# Altium PCB carrier board Ultrafiltrasi.PcbDoc (part 4 of 4)
Units mm, origin at the board's own origin, x right, y up, seen from the top; angles counter-clockwise.
Board outline 196.34 x 220.85 mm, 2 copper layers (Top Layer, Bottom Layer); 114 components, 209 nets, 667 pads, 70 vias.
Unrouted connection lines stored in the file: 5.
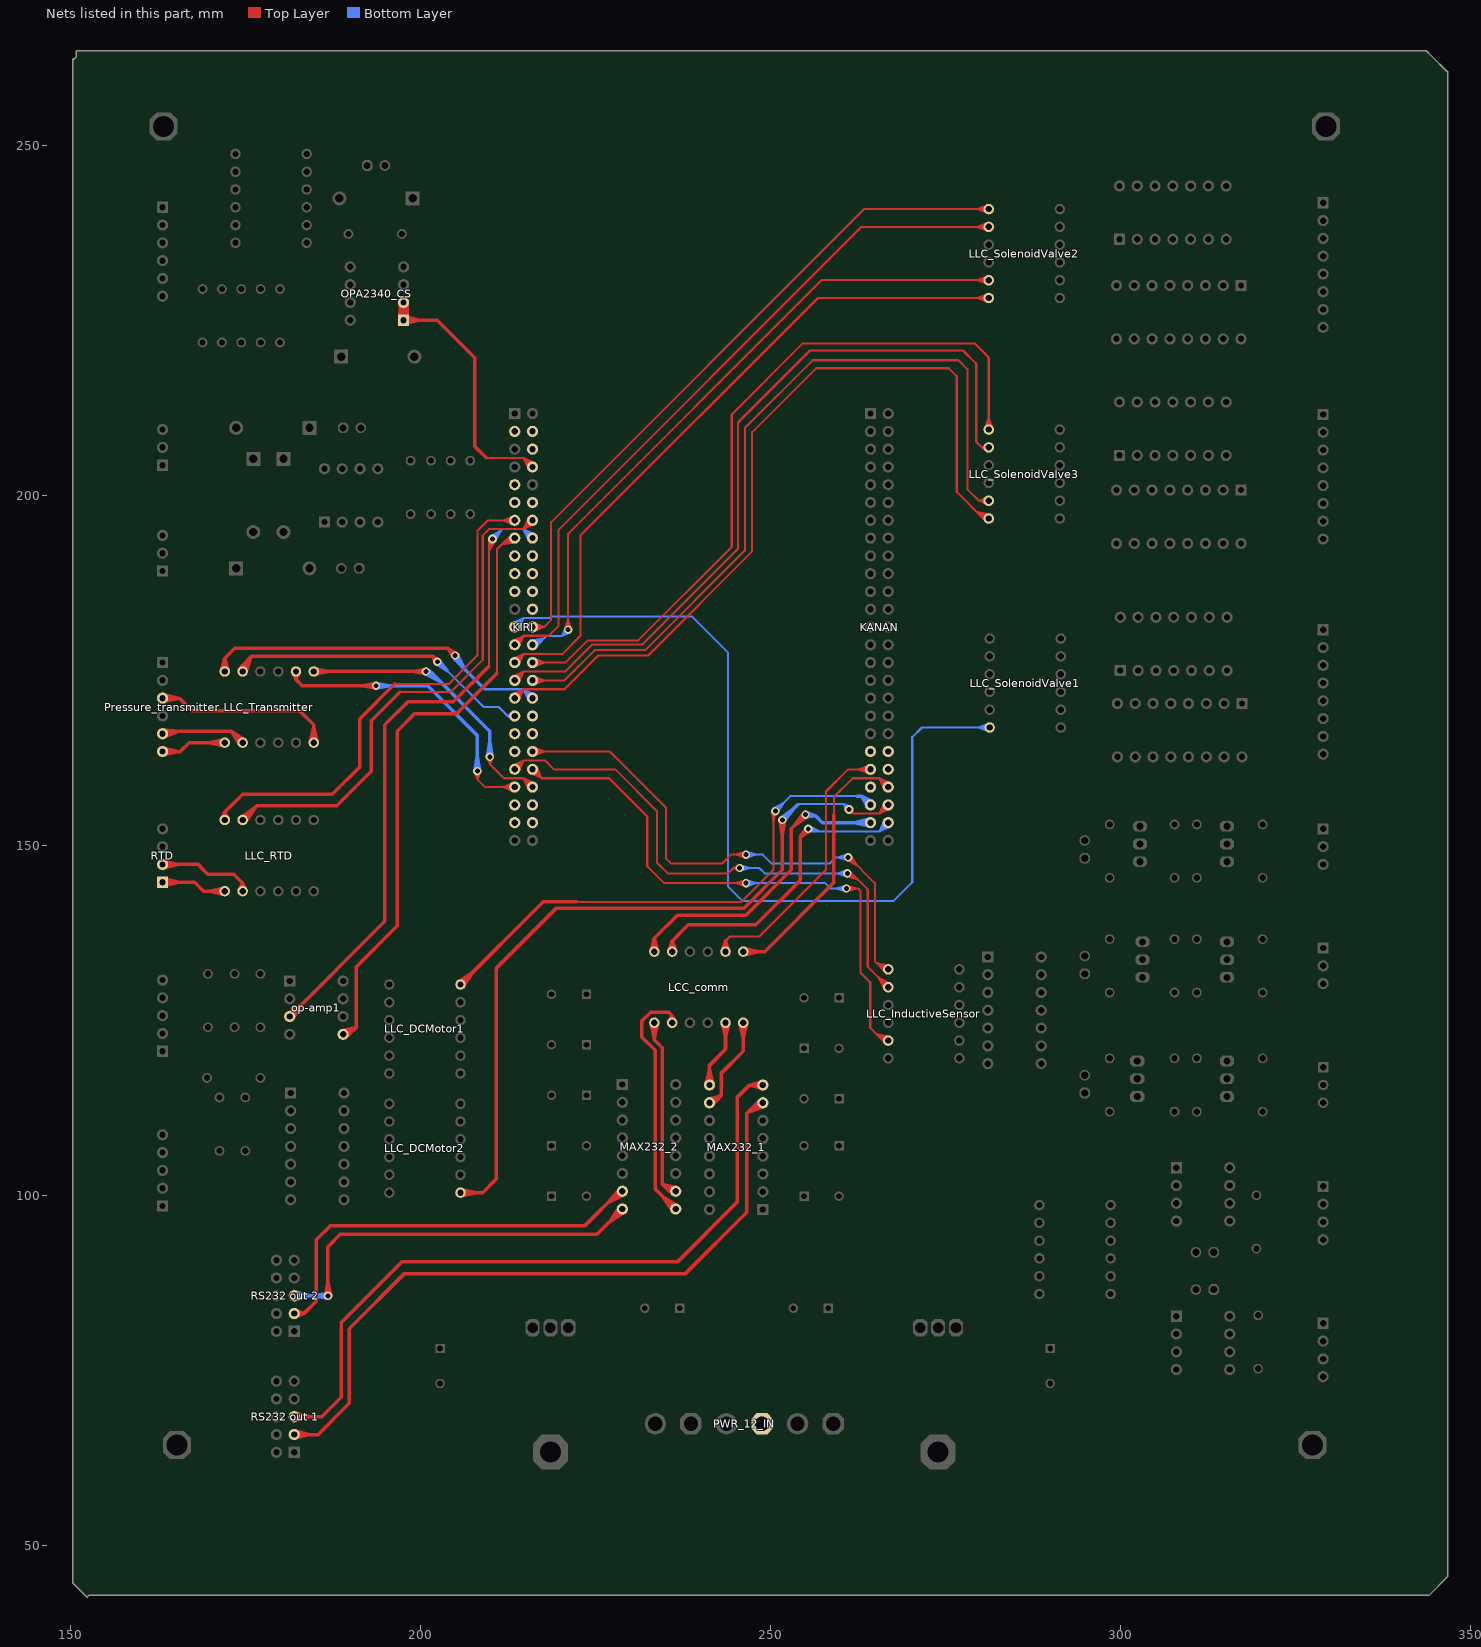
[diagram p4: the nets of this part, all layers, seen from the top]

## Via types
v1: diameter 1.2, hole 0.711, Top Layer to Bottom Layer, 26 vias
v2: diameter 1.27, hole 0.711, Top Layer to Bottom Layer, 24 vias
v3: diameter 1.2, hole 0.7, Top Layer to Bottom Layer, 19 vias
v4: diameter 1.5, hole 0.8, Top Layer to Bottom Layer, 1 vias

## Nets (pads, with @x,y where several pads share a name; then routed paths per layer and width w, separated by ;. In a path a pad name is that pad's centre, name@x,y a point inside that pad or via, vN(x,y) a via of type N, cw(c..) or ccw(c..) an arc to the next point about the centre after c; other vN are vias at no path point) (continued)
NetKANAN_39: KANAN.39
NetKANAN_40: KANAN.40
NetKANAN_41: KANAN.41 LCC_comm.P$2 | length 48.8
  Top Layer w0.3: 243.586,136.398 244.221,137.033 248.412,137.033 257.937,146.558 257.937,157.734 261.112,160.909 KANAN.41@264.287,160.909 ; KANAN.41@264.163,160.271 262.587,160.909 ; KANAN.41@264.163,161.547 262.587,160.909 ; KANAN.41@264.251,160.561 262.587,160.909 ; KANAN.41@264.251,161.257 262.587,160.909
  Top Layer w0.5: LCC_comm.P$2@243.093,134.956 243.586,136.398 ; LCC_comm.P$2@243.586,134.874 243.586,136.398 ; LCC_comm.P$2@244.079,134.956 243.586,136.398
NetKANAN_42: KANAN.42
NetKANAN_43: KANAN.43
NetKANAN_44: KANAN.44 LCC_comm.P$1 | length 52.1
  Top Layer w0.3: 259.08,154.432 259.08,156.972 261.747,159.639 265.557,159.639 ; KANAN.44@266.292,158 265.557,159.639 ; KANAN.44@266.557,158.147 265.557,159.639 ; KANAN.44@267.049,158.639 265.557,159.639 ; KANAN.44@267.196,158.904 265.557,159.639 ; 265.557,159.639 KANAN.44@266.827,158.369 265.557,159.639
  Top Layer w0.5: LCC_comm.P$1@246.126,134.874 249.174,134.874 259.08,144.78 259.08,154.432 ; LCC_comm.P$1@246.182,134.377 248.376,134.874 LCC_comm.P$1@246.182,135.371
NetKANAN_45: KANAN.45 LLC_DCMotor1.P$6 | length 92.1
  Top Layer w0.3: 222.25,141.986 245.872,141.986 250.444,146.558 250.444,154.686 v1(250.698,154.94) 250.444,153.367 v1@250.248,154.948
  Top Layer w0.5: LLC_DCMotor1.P$6@205.423,130.561 207.551,131.986 LLC_DCMotor1.P$6@206.126,129.858 ; LLC_DCMotor1.P$6@205.74,130.175 217.551,141.986 222.25,141.986
  Bottom Layer w0.3: v1@250.423,155.296 251.934,156.176 v1@251.054,154.665 ; v1(250.698,154.94) 252.837,157.079 262.382,157.079
  Bottom Layer w0.5: 262.382,157.079 263.037,157.079 ; KANAN.45@263.842,155.505 263.037,157.079 ; KANAN.45@264.611,156.274 263.037,157.079 ; 263.037,157.079 KANAN.45@264.287,155.829 263.037,157.079
NetKANAN_46: KANAN.46 LLC_DCMotor2.P$1 | length 135.6
  Top Layer w0.3: v2(261.239,155.194) 261.854,154.579 265.577,154.579 ; KANAN.46@266.291,156.196 265.577,154.579 ; KANAN.46@266.556,156.051 265.577,154.579 ; KANAN.46@267.049,155.558 265.577,154.579 ; KANAN.46@267.194,155.293 265.577,154.579 ; 265.577,154.579 KANAN.46@266.827,155.829 265.577,154.579
  Top Layer w0.5: LLC_DCMotor2.P$1@205.74,100.457 208.915,100.457 210.82,102.362 210.82,132.461 219.456,141.097 246.253,141.097 251.714,146.558 v3(251.714,153.67) 251.714,151.57 ; LLC_DCMotor2.P$1@205.796,99.96 207.99,100.457 LLC_DCMotor2.P$1@205.796,100.954 ; v3@251.365,153.641 251.714,151.57 ; v3@252.063,153.641 251.714,151.57
  Bottom Layer w0.3: 253.873,155.829 254,155.956 260.477,155.956 ; v2@260.828,154.937 260.477,155.956 ; v2@261.097,155.075 260.477,155.956 ; v2(261.239,155.194) 260.477,155.956 ; v2@261.358,155.336 260.477,155.956 ; v2@261.496,155.605 260.477,155.956
  Bottom Layer w0.5: v3@251.486,153.935 253.375,155.331 v3@251.979,153.442 ; v3(251.714,153.67) 253.873,155.829
NetKANAN_47: KANAN.47 LCC_comm.P$6 | length 63.9
  Top Layer w0.5: LCC_comm.P$6@232.93,134.94 233.426,136.779 ; LCC_comm.P$6@233.426,134.874 233.426,136.779 ; LCC_comm.P$6@233.922,134.94 233.426,136.779 ; v3@254.751,154.66 253.355,152.771 ; v3(255.016,154.432) 253.355,152.771 ; v3@255.244,154.167 253.355,152.771 ; v3@255.397,154.305 254.889,154.305 252.984,152.4 252.984,146.558 246.507,140.081 236.728,140.081 233.426,136.779
  Bottom Layer w0.5: v3@255.016,154.305 256.413,154.305 ; v3(255.016,154.432) 256.413,154.305 ; v3@255.028,154.082 256.413,154.305 ; v3@255.091,154.774 256.413,154.305 ; KANAN.47@264.221,152.743 261.987,153.289 KANAN.47@264.221,153.835 ; KANAN.47@264.287,153.289 257.429,153.289 256.413,154.305
NetKANAN_48: KANAN.48 LCC_comm.P$5 | length 65.5
  Top Layer w0.5: LCC_comm.P$5@235.473,134.956 235.966,136.398 ; LCC_comm.P$5@235.966,134.874 235.966,136.398 ; LCC_comm.P$5@236.459,134.956 235.966,136.398 ; v3@255.124,152.619 254.254,151.257 ; v3@255.27,152.273 254.254,151.257 ; v3@255.397,152.146 v3(255.397,152.4) 254.254,151.257 ; v3@255.616,152.127 254.254,151.257 ; 235.966,136.398 238.252,138.684 247.904,138.684 254.254,145.034 254.254,151.257
  Bottom Layer w0.3: v3@255.356,151.952 257.098,152.019 ; v3@255.551,152.823 257.098,152.019 ; KANAN.48@266.292,153.658 265.557,152.019 ; KANAN.48@266.557,153.511 265.557,152.019 ; KANAN.48@267.049,153.019 265.557,152.019 ; KANAN.48@267.196,152.754 265.557,152.019 ; 257.098,152.019 v3(255.397,152.4) 255.778,152.019 265.557,152.019 ; 265.557,152.019 KANAN.48@266.827,153.289 265.557,152.019
NetKIRI_3: KIRI.3 KIRI.4
NetKIRI_6: KIRI.6
NetKIRI_8: KIRI.8 OPA2340_CS.1 OPA2340_CS.2 | length 73.9
  Top Layer w0.3: 209.403,205.379 214.737,205.379 ; KIRI.8@215.493,203.719 214.737,205.379 ; KIRI.8@215.757,203.866 214.737,205.379 ; KIRI.8@216.25,204.359 214.737,205.379 ; KIRI.8@216.397,204.623 214.737,205.379 ; 214.737,205.379 KIRI.8@216.027,204.089 214.737,205.379
  Top Layer w0.5: OPA2340_CS.1@197.065,224.991 OPA2340_CS.2@197.116,227.311 ; OPA2340_CS.1@197.066,225.11 197.612,227.344 OPA2340_CS.1@198.158,225.11 ; OPA2340_CS.2@197.066,227.518 197.612,225.284 OPA2340_CS.2@198.158,227.518 ; OPA2340_CS.1@197.092,225.224 OPA2340_CS.2@198.108,227.311 ; OPA2340_CS.2@197.612,227.584 OPA2340_CS.1@197.612,225.044 ; OPA2340_CS.1@197.678,224.498 199.912,225.044 OPA2340_CS.1@197.678,225.59 ; OPA2340_CS.1@198.132,225.224 OPA2340_CS.2@197.116,227.311 ; OPA2340_CS.1@198.159,224.991 OPA2340_CS.2@198.108,227.311 ; 209.403,205.379 207.772,207.01 207.772,219.71 202.438,225.044 OPA2340_CS.1@197.612,225.044 ; OPA2340_CS.2@197.116,227.311 OPA2340_CS.1@197.612,225.044 ; OPA2340_CS.1@197.612,225.044 OPA2340_CS.2@198.108,227.311
NetKIRI_9: KIRI.9
NetKIRI_11: KIRI.11
NetKIRI_12: KIRI.12
NetKIRI_13: KIRI.13 LLC_RTD.P$6 | length 83.3
  Top Layer w0.3: 196.342,173.101 204.089,173.101 208.153,177.165 208.153,194.945 209.677,196.469 KIRI.13@213.487,196.469 ; KIRI.13@213.363,195.831 211.787,196.469 ; KIRI.13@213.363,197.107 211.787,196.469 ; KIRI.13@213.451,196.121 211.787,196.469 ; KIRI.13@213.451,196.817 211.787,196.469
  Top Layer w0.5: LLC_RTD.P$6@171.597,153.779 172.085,154.813 ; LLC_RTD.P$6@172.085,153.67 172.085,154.813 ; LLC_RTD.P$6@172.573,153.779 172.085,154.813 ; 196.342,173.101 191.389,168.148 191.389,161.29 187.452,157.353 174.625,157.353 172.085,154.813
NetKIRI_14: KIRI.14 LLC_RTD.P$5 | length 87.9
  Top Layer w0.3: 197.04,171.958 204.343,171.958 208.915,176.53 208.915,194.31 209.804,195.199 214.757,195.199 ; KIRI.14@215.492,196.838 214.757,195.199 ; KIRI.14@215.757,196.691 214.757,195.199 ; KIRI.14@216.249,196.199 214.757,195.199 ; KIRI.14@216.396,195.934 214.757,195.199 ; 214.757,195.199 KIRI.14@216.027,196.469 214.757,195.199
  Top Layer w0.5: LLC_RTD.P$5@174.308,154.056 176.436,155.481 LLC_RTD.P$5@175.011,153.353 ; LLC_RTD.P$5@174.625,153.67 176.657,155.702 188.087,155.702 192.992,160.607 192.992,167.846 197.04,171.894
NetKIRI_15: KIRI.15 op-amp1.5 | length 115.1
  Top Layer w0.3: 210.947,174.625 210.947,192.318 212.558,193.929 ; KIRI.15@213.111,194.459 211.659,193.03 ; KIRI.15@213.306,194.229 211.659,193.03 ; KIRI.15@213.614,193.603 211.659,193.03 ; KIRI.15@213.677,193.307 211.659,193.03 ; 211.659,193.03 KIRI.15@213.487,193.929 ; 212.558,193.929 KIRI.15@213.487,193.929 ; 212.558,193.929 213.421,194.273 212.558,193.929 ; 212.558,193.929 213.421,193.585 212.558,193.929 ; 212.558,193.929 213.26,194.538 212.558,193.929 ; 212.558,193.929 213.26,193.32 212.558,193.929 ; 212.558,193.929 KIRI.15@213.487,193.929
  Top Layer w0.5: op-amp1.5@188.781,123.577 190.881,124.079 ; op-amp1.5@189.295,122.615 190.881,124.079 ; 210.947,174.625 205.2,168.878 199.231,168.878 196.723,166.37 196.723,138.557 190.881,132.715 190.881,124.079 ; op-amp1.5@188.976,123.063 189.865,123.063 ; op-amp1.5@188.976,123.063 190.881,124.079 ; op-amp1.5@188.976,123.063 189.865,123.063 ; 189.865,123.063 189.146,122.54 189.865,123.063 ; 189.865,123.063 189.146,123.586 189.865,123.063 ; 189.865,123.063 190.881,124.079
NetKIRI_16: KIRI.16 op-amp1.3 | length 121.2
  Top Layer w0.3: 209.804,175.641 209.804,193.294 v2(210.312,193.802) 209.804,192.1 ; v2@209.833,193.876 209.804,192.1 ; v2@210.132,193.846 209.804,192.1 ; v2@210.486,193.74 209.804,192.1 ; v2@210.753,193.601 209.804,192.1 ; KIRI.16@215.987,193.929 KIRI.16@216.027,193.929
  Top Layer w0.5: op-amp1.3@181.01,126.03 183.217,127.464 op-amp1.3@181.783,125.257 ; op-amp1.3@181.356,125.603 194.945,139.192 194.945,167.259 198.247,170.561 204.724,170.561 209.804,175.641
  Bottom Layer w0.3: v2@210.018,194.188 211.583,195.073 ; v2@210.188,193.939 211.583,195.073 ; v2(210.312,193.802) 211.709,195.199 214.757,195.199 ; v2@210.449,193.678 211.583,195.073 ; v2@210.698,193.508 211.583,195.073 ; KIRI.16@215.492,193.56 214.757,195.199 ; KIRI.16@215.757,193.707 214.757,195.199 ; KIRI.16@216.249,194.199 214.757,195.199 ; KIRI.16@216.396,194.464 214.757,195.199 ; 214.757,195.199 KIRI.16@216.027,193.929 214.757,195.199
NetKIRI_17: KIRI.17
NetKIRI_18: KIRI.18
NetKIRI_19: KIRI.19
NetKIRI_20: KIRI.20
NetKIRI_21: KIRI.21
NetKIRI_22: KIRI.22
NetKIRI_24: KIRI.24
NetKIRI_25: KIRI.25 LLC_SolenoidValve1.P$6 | length 141.1
  Bottom Layer w0.3: KIRI.25@213.117,181.763 214.777,182.519 ; KIRI.25@213.264,181.499 214.777,182.519 ; KIRI.25@213.487,181.229 214.777,182.519 ; KIRI.25@213.757,181.006 214.777,182.519 ; KIRI.25@214.021,180.859 214.777,182.519 ; LLC_SolenoidValve1.P$6@281.196,166.288 279.655,166.878 ; LLC_SolenoidValve1.P$6@281.196,167.468 279.655,166.878 ; LLC_SolenoidValve1.P$6@281.278,166.579 279.655,166.878 ; LLC_SolenoidValve1.P$6@281.278,167.177 279.655,166.878 ; LLC_SolenoidValve1.P$6@281.305,166.878 271.653,166.878 270.256,165.481 270.256,144.78 267.589,142.113 245.999,142.113 243.967,144.145 243.967,177.546 238.76,182.753 218.694,182.753 218.46,182.519 214.777,182.519
NetKIRI_26: KIRI.26 LLC_SolenoidValve2.P$1 | length 111.3
  Top Layer w0.3: KIRI.26@216.027,181.229 217.678,181.229 ; KIRI.26@216.064,180.881 217.678,181.229 ; KIRI.26@216.064,181.577 217.678,181.229 ; KIRI.26@216.155,180.592 217.678,181.229 ; KIRI.26@216.155,181.866 217.678,181.229 ; LLC_SolenoidValve2.P$1@281.069,240.329 279.528,240.919 ; LLC_SolenoidValve2.P$1@281.069,241.509 279.528,240.919 ; LLC_SolenoidValve2.P$1@281.151,240.62 279.528,240.919 ; LLC_SolenoidValve2.P$1@281.151,241.218 279.528,240.919 ; LLC_SolenoidValve2.P$1@281.178,240.919 263.398,240.919 218.694,196.215 218.694,182.245 217.678,181.229
NetKIRI_27: KIRI.27 LLC_SolenoidValve2.P$2 | length 114.3
  Top Layer w0.3: KIRI.27@213.117,179.223 214.777,179.979 ; KIRI.27@213.264,178.959 214.777,179.979 ; KIRI.27@213.487,178.689 214.777,179.979 ; KIRI.27@213.757,178.466 214.777,179.979 ; KIRI.27@214.021,178.319 214.777,179.979 ; LLC_SolenoidValve2.P$2@281.069,237.789 279.528,238.379 ; LLC_SolenoidValve2.P$2@281.069,238.969 279.528,238.379 ; LLC_SolenoidValve2.P$2@281.151,238.08 279.528,238.379 ; LLC_SolenoidValve2.P$2@281.151,238.678 279.528,238.379 ; LLC_SolenoidValve2.P$2@281.178,238.379 263.017,238.379 219.71,195.072 219.71,181.356 218.333,179.979 214.777,179.979
NetKIRI_28: KIRI.28 LLC_SolenoidValve2.P$5 | length 116.9
  Top Layer w0.3: v1@220.662,180.916 221.107,182.348 v1@221.552,180.916 ; v1(221.107,180.848) 221.107,194.564 257.302,230.759 LLC_SolenoidValve2.P$5@281.178,230.759 ; LLC_SolenoidValve2.P$5@281.069,230.169 279.528,230.759 ; LLC_SolenoidValve2.P$5@281.069,231.349 279.528,230.759 ; LLC_SolenoidValve2.P$5@281.151,230.46 279.528,230.759 ; LLC_SolenoidValve2.P$5@281.151,231.058 279.528,230.759
  Bottom Layer w0.3: KIRI.28@215.803,179.299 217.78,179.68 ; KIRI.28@215.882,179.008 217.78,179.68 ; KIRI.28@216.225,178.4 217.78,179.68 ; KIRI.28@216.434,178.182 217.78,179.68 ; v1@220.737,181.104 220.218,179.959 ; v1(221.107,180.848) 220.218,179.959 ; v1@221.363,180.478 220.218,179.959 ; 217.78,179.68 KIRI.28@216.027,178.689 216.789,178.689 218.059,179.959 220.218,179.959
NetKIRI_29: KIRI.29 LLC_SolenoidValve2.P$6 | length 111.3
  Top Layer w0.3: KIRI.29@213.12,176.685 214.737,177.399 ; KIRI.29@213.265,176.42 214.737,177.399 ; KIRI.29@213.487,176.149 214.737,177.399 ; KIRI.29@213.758,175.927 214.737,177.399 ; KIRI.29@214.023,175.782 214.737,177.399 ; LLC_SolenoidValve2.P$6@281.069,227.629 279.528,228.219 ; LLC_SolenoidValve2.P$6@281.069,228.809 279.528,228.219 ; LLC_SolenoidValve2.P$6@281.151,227.92 279.528,228.219 ; LLC_SolenoidValve2.P$6@281.151,228.518 279.528,228.219 ; LLC_SolenoidValve2.P$6@281.178,228.219 256.794,228.219 222.885,194.31 222.885,179.959 220.325,177.399 214.737,177.399
NetKIRI_30: KIRI.30 LLC_SolenoidValve3.P$1 | length 119.6
  Top Layer w0.3: KIRI.30@216.027,176.149 220.726,176.149 223.901,179.324 231.14,179.324 244.475,192.659 244.475,211.582 254.635,221.742 279.146,221.742 281.178,219.71 LLC_SolenoidValve3.P$1@281.178,209.423 ; KIRI.30@216.063,175.801 217.727,176.149 ; KIRI.30@216.063,176.497 217.727,176.149 ; KIRI.30@216.151,175.511 217.727,176.149 ; KIRI.30@216.151,176.787 217.727,176.149 ; LLC_SolenoidValve3.P$1@280.588,209.532 281.178,211.073 ; LLC_SolenoidValve3.P$1@280.879,209.45 281.178,211.073 ; LLC_SolenoidValve3.P$1@281.477,209.45 281.178,211.073 ; LLC_SolenoidValve3.P$1@281.768,209.532 281.178,211.073
NetKIRI_31: KIRI.31 LLC_SolenoidValve3.P$2 | length 121.3
  Top Layer w0.3: KIRI.31@213.118,174.144 214.757,174.879 ; KIRI.31@213.265,173.879 214.757,174.879 ; KIRI.31@213.487,173.609 214.757,174.879 ; KIRI.31@213.757,173.387 214.757,174.879 ; KIRI.31@214.022,173.24 214.757,174.879 ; LLC_SolenoidValve3.P$2@281.001,206.31 280.162,206.883 ; LLC_SolenoidValve3.P$2@281.001,207.456 280.162,206.883 ; LLC_SolenoidValve3.P$2@281.134,206.586 280.162,206.883 ; LLC_SolenoidValve3.P$2@281.134,207.18 280.162,206.883 ; LLC_SolenoidValve3.P$2@281.178,206.883 280.162,206.883 ; 214.757,174.879 220.686,174.879 224.531,178.724 231.683,178.724 245.364,192.405 245.364,210.439 255.651,220.726 277.495,220.726 279.4,218.821 279.4,207.645 280.162,206.883
NetKIRI_32: KIRI.32 LLC_SolenoidValve3.P$5 | length 126.5
  Top Layer w0.3: KIRI.32@216.027,173.609 220.599,173.609 224.917,177.927 232.116,177.927 246.38,192.191 246.38,209.677 256.032,219.329 276.86,219.329 278.13,218.059 278.13,200.914 279.781,199.263 ; KIRI.32@216.063,173.261 217.727,173.609 ; KIRI.32@216.063,173.957 217.727,173.609 ; KIRI.32@216.151,172.971 217.727,173.609 ; KIRI.32@216.151,174.247 217.727,173.609 ; LLC_SolenoidValve3.P$5@281.049,198.677 279.781,199.263 ; LLC_SolenoidValve3.P$5@281.049,199.849 279.781,199.263 ; LLC_SolenoidValve3.P$5@281.146,198.965 279.781,199.263 ; LLC_SolenoidValve3.P$5@281.146,199.561 279.781,199.263 ; 279.781,199.263 LLC_SolenoidValve3.P$5@281.178,199.263 279.781,199.263
NetKIRI_33: KIRI.33 LLC_SolenoidValve3.P$6 | length 140
  Top Layer w0.3: KIRI.33@213.118,171.604 214.757,172.339 ; KIRI.33@213.265,171.339 214.757,172.339 ; KIRI.33@213.487,171.069 214.757,172.339 ; KIRI.33@213.757,170.847 214.757,172.339 ; KIRI.33@214.022,170.7 214.757,172.339 ; LLC_SolenoidValve3.P$6@280.807,196.251 279.403,197.736 ; LLC_SolenoidValve3.P$6@281.011,196.474 279.403,197.736 ; LLC_SolenoidValve3.P$6@281.307,196.994 279.403,197.736 ; LLC_SolenoidValve3.P$6@281.396,197.282 279.403,197.736 ; 214.757,172.339 220.599,172.339 225.425,177.165 232.537,177.165 247.396,192.024 247.396,209.042 256.54,218.186 275.463,218.186 276.606,217.043 276.606,200.533 280.416,196.723 ; 279.403,197.736 LLC_SolenoidValve3.P$6@281.178,196.723 ; 280.416,196.723 LLC_SolenoidValve3.P$6@281.178,196.723 ; 280.416,196.723 281.119,197.017 280.416,196.723 ; 280.416,196.723 281.119,196.429 280.416,196.723 ; 280.416,196.723 280.942,197.275 280.416,196.723 ; 280.416,196.723 280.942,196.171 280.416,196.723 ; 280.416,196.723 LLC_SolenoidValve3.P$6@281.178,196.723
NetKIRI_34: KIRI.34 LLC_Transmitter.P$6 | length 77.3
  Top Layer w0.5: LLC_Transmitter.P$6@171.589,174.945 172.085,176.784 ; LLC_Transmitter.P$6@172.085,174.879 172.085,176.784 ; LLC_Transmitter.P$6@172.581,174.945 172.085,176.784 ; v3@204.702,176.949 203.962,178.181 ; v3@205.194,177.441 203.962,178.181 ; 172.085,176.784 173.482,178.181 203.962,178.181 ; 203.962,178.181 v3(204.978,177.165) 203.962,178.181
  Bottom Layer w0.3: 209.042,172.466 209.169,172.339 214.757,172.339 ; KIRI.34@215.492,170.7 214.757,172.339 ; KIRI.34@215.757,170.847 214.757,172.339 ; KIRI.34@216.249,171.339 214.757,172.339 ; KIRI.34@216.396,171.604 214.757,172.339 ; 214.757,172.339 KIRI.34@216.027,171.069 214.757,172.339
  Bottom Layer w0.5: v3@204.704,176.947 206.345,175.163 ; v3@205.281,177.341 206.345,175.163 ; 209.042,172.466 204.978,176.53 ; 204.978,176.53 v3(204.978,177.165) ; 204.978,176.53 204.642,177.069 204.978,176.53 ; 204.978,176.53 205.314,177.069 204.978,176.53 ; 204.978,176.53 v3(204.978,177.165) ; v3(204.978,177.165) 206.345,175.163
NetKIRI_35: KIRI.35 LLC_Transmitter.P$5 | length 68.5
  Top Layer w0.5: LLC_Transmitter.P$5@174.221,175.174 175.895,177.038 ; LLC_Transmitter.P$5@175.079,174.67 175.895,177.038 ; v3@202.134,176.103 201.803,177.038 ; v3(202.438,176.276) 201.803,177.038 ; v3@202.438,176.403 201.803,177.038 ; v3@202.663,176.544 201.803,177.038 ; LLC_Transmitter.P$5@174.625,174.879 174.625,175.768 ; LLC_Transmitter.P$5@174.625,174.879 175.895,177.038 ; LLC_Transmitter.P$5@174.625,174.879 174.625,175.768 ; 174.625,175.768 175.105,175.02 174.625,175.768 ; 174.625,175.768 174.145,175.02 174.625,175.768 ; 174.625,175.768 175.895,177.038 ; 175.895,177.038 201.803,177.038
  Bottom Layer w0.3: 203.835,175.006 209.042,169.799 211.201,169.799 212.471,168.529 ; KIRI.35@213.279,167.913 212.471,168.529 ; KIRI.35@213.279,169.145 212.471,168.529 ; KIRI.35@213.427,168.184 212.471,168.529 ; KIRI.35@213.427,168.874 212.471,168.529 ; KIRI.35@213.487,168.529 212.471,168.529
  Bottom Layer w0.5: v3@202.228,175.996 203.835,175.006 ; v3(202.438,176.276) 203.835,175.006 ; v3@202.438,176.403 203.835,175.006 ; v3@202.696,176.512 203.835,175.006
NetKIRI_36: KIRI.36
NetKIRI_37: KIRI.37
NetKIRI_38: KIRI.38
NetKIRI_39: KIRI.39
NetKIRI_40: KIRI.40 LLC_InductiveSensor.P$1 | length 114.3
  Top Layer w0.3: KIRI.40@216.027,163.449 227.076,163.449 235.077,155.448 235.077,148.209 235.839,147.447 243.078,147.447 244.348,148.717 v1(246.507,148.717) ; KIRI.40@216.063,163.101 217.727,163.449 ; KIRI.40@216.063,163.797 217.727,163.449 ; KIRI.40@216.151,162.811 217.727,163.449 ; KIRI.40@216.151,164.087 217.727,163.449 ; v1@246.439,148.272 245.007,148.717 v1@246.439,149.162 ; v1@260.856,147.966 262.404,147.171 ; v1(261.112,148.336) 262.404,147.171 ; v1@261.175,148.399 264.922,144.653 264.922,133.477 266.065,132.334 ; v1@261.454,148.628 262.404,147.171 ; LLC_InductiveSensor.P$1@266.461,131.858 265.167,133.232 ; LLC_InductiveSensor.P$1@266.664,132.082 265.167,133.232 ; LLC_InductiveSensor.P$1@266.948,132.608 265.167,133.232 ; LLC_InductiveSensor.P$1@267.025,132.9 265.167,133.232 ; 265.167,133.232 LLC_InductiveSensor.P$1@266.827,132.334 ; 266.065,132.334 LLC_InductiveSensor.P$1@266.827,132.334 ; 266.065,132.334 266.768,132.628 266.065,132.334 ; 266.065,132.334 266.768,132.04 266.065,132.334 ; 266.065,132.334 266.591,132.886 266.065,132.334 ; 266.065,132.334 266.591,131.782 266.065,132.334 ; 266.065,132.334 LLC_InductiveSensor.P$1@266.827,132.334 ; 266.065,132.334 LLC_InductiveSensor.P$1@266.827,132.334
  Bottom Layer w0.3: v1(246.507,148.717) 248.92,148.717 250.19,147.447 258.445,147.447 259.334,148.336 v1(261.112,148.336) ; v1@246.575,148.272 248.007,148.717 v1@246.575,149.162 ; v1@261.044,147.891 259.612,148.336 v1@261.044,148.781
NetKIRI_41: KIRI.41 LLC_InductiveSensor.P$2 | length 112.9
  Top Layer w0.3: KIRI.41@213.118,161.444 214.757,162.179 ; KIRI.41@213.265,161.179 214.757,162.179 ; KIRI.41@213.487,160.909 214.757,162.179 ; KIRI.41@213.757,160.687 214.757,162.179 ; KIRI.41@214.022,160.54 214.757,162.179 ; v1@245.504,146.377 244.729,146.812 ; v1@245.504,147.247 244.729,146.812 ; v1@260.807,145.637 262.53,145.14 ; v1@261.26,146.406 262.53,145.14 ; LLC_InductiveSensor.P$2@266.343,129.44 265.441,131.18 ; LLC_InductiveSensor.P$2@266.599,129.599 265.441,131.18 ; LLC_InductiveSensor.P$2@267.022,130.022 265.441,131.18 ; LLC_InductiveSensor.P$2@267.181,130.278 265.441,131.18 ; 214.757,162.179 217.805,162.179 219.075,160.909 227.838,160.909 233.807,154.94 233.807,147.574 235.331,146.05 243.967,146.05 244.729,146.812 ; 244.729,146.812 v1(245.618,146.812) 244.729,146.812 ; v1(260.985,146.05) 261.62,146.05 ; v1(260.985,146.05) 262.53,145.14 ; v1(260.985,146.05) 261.62,146.05 ; 261.62,146.05 261.144,145.629 261.62,146.05 ; 261.62,146.05 261.144,146.471 261.62,146.05 ; 261.62,146.05 263.906,143.764 263.906,132.715 LLC_InductiveSensor.P$2@266.827,129.794 265.441,131.18
  Bottom Layer w0.3: v1(245.618,146.812) 248.412,146.812 249.174,146.05 v1(260.985,146.05) ; v1@245.686,146.367 247.118,146.812 v1@245.686,147.257 ; v1@260.917,145.605 259.485,146.05 v1@260.917,146.495
NetKIRI_42: KIRI.42 LLC_InductiveSensor.P$5 | length 119
  Top Layer w0.3: KIRI.42@215.658,160.374 217.297,159.639 ; KIRI.42@215.805,160.639 217.297,159.639 ; KIRI.42@216.027,160.909 217.297,159.639 ; KIRI.42@216.297,161.131 217.297,159.639 ; KIRI.42@216.562,161.278 217.297,159.639 ; v1@246.439,144.208 245.007,144.653 ; v1@246.439,145.098 245.007,144.653 ; v1(260.858,143.891) 262.509,143.891 262.89,143.51 262.89,131.826 264.255,130.461 264.255,123.984 266.065,122.174 ; v1@260.926,143.446 262.358,143.891 v1@260.926,144.336 ; LLC_InductiveSensor.P$5@266.459,121.7 265.116,123.123 ; LLC_InductiveSensor.P$5@266.662,121.924 265.116,123.123 ; LLC_InductiveSensor.P$5@266.952,122.447 265.116,123.123 ; LLC_InductiveSensor.P$5@267.034,122.737 265.116,123.123 ; 217.297,159.639 226.949,159.639 232.41,154.178 232.41,147.066 234.823,144.653 v1(246.507,144.653) 245.007,144.653 ; 265.116,123.123 LLC_InductiveSensor.P$5@266.827,122.174 ; 266.065,122.174 LLC_InductiveSensor.P$5@266.827,122.174 ; 266.065,122.174 266.768,122.468 266.065,122.174 ; 266.065,122.174 266.768,121.88 266.065,122.174 ; 266.065,122.174 266.591,122.726 266.065,122.174 ; 266.065,122.174 266.591,121.622 266.065,122.174 ; 266.065,122.174 LLC_InductiveSensor.P$5@266.827,122.174
  Bottom Layer w0.3: v1(246.507,144.653) 257.81,144.653 258.572,143.891 v1(260.858,143.891) ; v1@246.575,144.208 248.007,144.653 v1@246.575,145.098 ; v1@260.79,143.446 259.358,143.891 v1@260.79,144.336
NetKIRI_43: KIRI.43 LLC_Transmitter.P$2 | length 68.5
  Top Layer w0.3: v1@207.712,160.566 208.153,159.512 ; v1(208.153,160.655) 208.153,159.512 ; v1@208.594,160.566 208.153,159.512 ; KIRI.43@213.363,157.731 211.787,158.369 ; KIRI.43@213.363,159.007 211.787,158.369 ; KIRI.43@213.451,158.021 211.787,158.369 ; KIRI.43@213.451,158.717 211.787,158.369 ; KIRI.43@213.487,158.369 209.296,158.369 208.153,159.512
  Top Layer w0.5: LLC_Transmitter.P$2@181.757,174.77 182.245,173.736 ; LLC_Transmitter.P$2@182.245,174.879 182.245,173.736 ; LLC_Transmitter.P$2@182.733,174.77 182.245,173.736 ; v3@193.646,172.498 191.575,172.847 ; v3@193.646,173.196 191.575,172.847 ; 182.245,173.736 183.134,172.847 v3(193.675,172.847) 191.575,172.847
  Bottom Layer w0.5: v3(193.675,172.847) 201.041,172.847 208.153,165.735 v1(208.153,160.655) ; v3@193.704,172.498 195.775,172.847 v3@193.704,173.196 ; v1@207.804,160.684 208.153,162.755 v1@208.502,160.684
NetKIRI_44: KIRI.44 LLC_Transmitter.P$1 | length 75.3
  Top Layer w0.3: v1@209.492,162.587 209.931,161.671 ; v1(209.931,162.687) 209.931,161.671 ; v1@210.37,162.587 209.931,161.671 ; KIRI.44@215.492,158 214.757,159.639 ; KIRI.44@215.757,158.147 214.757,159.639 ; KIRI.44@216.249,158.639 214.757,159.639 ; KIRI.44@216.396,158.904 214.757,159.639 ; 209.931,161.671 211.963,159.639 214.757,159.639 ; 214.757,159.639 KIRI.44@216.027,158.369 214.757,159.639
  Top Layer w0.5: LLC_Transmitter.P$1@184.785,174.879 v3(200.787,174.879) ; LLC_Transmitter.P$1@184.841,174.382 187.035,174.879 LLC_Transmitter.P$1@184.841,175.376 ; v3@200.758,174.53 198.687,174.879 v3@200.758,175.228
  Bottom Layer w0.5: v3@200.61,174.577 202.816,173.485 ; v3@201.005,175.153 202.816,173.485 ; v1@209.582,162.716 209.931,164.787 v1@210.28,162.716 ; v1(209.931,162.687) 209.931,166.37 201.422,174.879 ; v3(200.787,174.879) 201.422,174.879 ; v3(200.787,174.879) 202.816,173.485 ; v3(200.787,174.879) 201.422,174.879 ; 201.422,174.879 200.883,174.543 201.422,174.879 ; 201.422,174.879 200.883,175.215 201.422,174.879
NetKIRI_45: KIRI.45
NetKIRI_46: KIRI.46
NetKIRI_47: KIRI.47
NetKIRI_48: KIRI.48
NetLCC_comm_P$7: LCC_comm.P$7 MAX232_2.10 | length 40.9
  Top Layer w0.5: LCC_comm.P$7@232.929,124.658 233.426,122.464 ; LCC_comm.P$7@233.923,124.658 233.426,122.464 ; MAX232_2.10@236.155,100.204 234.569,101.668 ; MAX232_2.10@236.304,100.129 235.585,100.652 ; MAX232_2.10@236.304,101.175 235.585,100.652 ; MAX232_2.10@236.669,101.166 234.569,101.668 ; 233.426,122.464 LCC_comm.P$7@233.426,124.714 233.426,122.301 234.569,121.158 234.569,101.668 ; 234.569,101.668 MAX232_2.10@236.474,100.652 235.585,100.652 ; 234.569,101.668 235.585,100.652
NetLCC_comm_P$8: LCC_comm.P$8 MAX232_2.9 | length 44.9
  Top Layer w0.5: LCC_comm.P$8@235.481,124.837 235.966,125.73 ; LCC_comm.P$8@235.966,124.714 235.966,125.73 ; MAX232_2.9@236.053,97.758 234.588,99.93 ; LCC_comm.P$8@236.451,124.837 235.966,125.73 ; MAX232_2.9@236.812,98.546 234.588,99.93 ; 234.588,99.93 MAX232_2.9@236.474,98.112 236.406,98.112 233.553,100.965 233.553,120.777 231.648,122.682 231.648,124.968 232.918,126.238 235.458,126.238 235.966,125.73
NetLCC_comm_P$11: LCC_comm.P$11 MAX232_1.9 | length 18.9
  Top Layer w0.5: MAX232_1.9@240.754,115.89 241.3,118.124 MAX232_1.9@241.846,115.89 ; MAX232_1.9@241.3,115.824 241.3,118.618 243.586,120.904 LCC_comm.P$11@243.586,124.714 ; LCC_comm.P$11@243.089,124.658 243.586,122.464 LCC_comm.P$11@244.083,124.658
NetLCC_comm_P$12: LCC_comm.P$12 MAX232_1.10 | length 24.1
  Top Layer w0.5: MAX232_1.10@241.081,113.789 242.951,114.3 ; MAX232_1.10@241.652,112.861 242.951,114.3 ; LCC_comm.P$12@245.629,124.658 246.126,122.464 LCC_comm.P$12@246.623,124.658 ; LCC_comm.P$12@246.126,124.714 246.126,120.65 242.951,117.475 242.951,114.3 ; 242.951,114.3 MAX232_1.10@241.3,113.284 241.935,113.284 242.951,114.3
NetLLC_Transmitter_P$12: LLC_Transmitter.P$12 Pressure_transmitter.3 | length 34.8
  Top Layer w0.5: Pressure_transmitter.3@163.195,171.069 165.608,171.069 167.386,169.291 182.753,169.291 184.785,167.259 LLC_Transmitter.P$12@184.785,164.719 ; Pressure_transmitter.3@163.261,170.523 165.495,171.069 Pressure_transmitter.3@163.261,171.615 ; LLC_Transmitter.P$12@184.288,164.775 184.785,166.969 LLC_Transmitter.P$12@185.282,164.775
NetMAX232_1_7: "RS232 out 1.3" MAX232_1.7 | length 113.5
  Top Layer w0.5: 181.991,65.913 185.42,65.913 189.865,70.358 189.865,81.026 197.739,88.9 237.871,88.9 246.634,97.663 246.634,111.76 248.158,113.284 MAX232_1.7@248.92,113.284 246.719,111.845 ; 182.057,65.367 184.291,65.913 182.057,66.459 ; MAX232_1.7@248.573,113.71 246.719,111.845 ; MAX232_1.7@249.171,112.795 246.719,111.845
NetMAX232_1_8: "RS232 out 1.5" MAX232_1.8 | length 111.9
  Top Layer w0.5: 181.991,68.453 185.928,68.453 188.722,71.247 188.722,81.915 197.358,90.551 236.728,90.551 245.237,99.06 245.237,114.046 247.015,115.824 ; 182.057,67.907 184.291,68.453 182.057,68.999 ; MAX232_1.8@248.841,115.28 247.015,115.824 ; MAX232_1.8@248.841,116.368 247.015,115.824 ; 247.015,115.824 MAX232_1.8@248.92,115.824 247.015,115.824
NetMAX232_2_7: "RS232 out 2.3" MAX232_2.7 | length 70
  Top Layer w0.5: 181.991,83.185 183.388,83.185 ; 182.099,82.646 183.388,83.185 ; 182.099,83.724 183.388,83.185 ; MAX232_2.7@228.47,101.046 226.775,99.013 ; MAX232_2.7@229.148,100.187 226.775,99.013 ; 183.388,83.185 185.166,84.963 185.166,93.726 187.198,95.758 223.52,95.758 228.414,100.652 MAX232_2.7@228.854,100.652 226.775,99.013
NetMAX232_2_8: "RS232 out 2.5" MAX232_2.8 | length 77.1
  Top Layer w0.5: v2@186.434,85.76 186.817,87.86 v2@187.2,85.76 ; v2(186.817,85.725) 186.817,92.71 188.595,94.488 225.23,94.488 MAX232_2.8@228.854,98.112 226.993,96.251 ; MAX232_2.8@228.427,98.458 226.993,96.251 ; MAX232_2.8@229.2,97.685 226.993,96.251
  Bottom Layer w0.5: 181.991,85.725 v2(186.817,85.725) ; 182.057,85.179 184.291,85.725 182.057,86.271 ; v2@186.782,85.342 184.682,85.725 v2@186.782,86.108
NetPWR_12_IN_1: PWR_12_IN.1
NRX: LLC_RTD.P$8 RTD.2 | length 20.6
  Top Layer w0.5: RTD.2@163.195,147.32 168.275,147.32 169.672,145.923 173.355,145.923 174.625,144.653 ; RTD.2@163.261,146.774 165.495,147.32 RTD.2@163.261,147.866 ; LLC_RTD.P$8@174.137,143.619 174.625,144.653 ; LLC_RTD.P$8@174.625,143.51 174.625,144.653 ; LLC_RTD.P$8@175.113,143.619 174.625,144.653
NTX: LLC_RTD.P$7 RTD.1 | length 18.5
  Top Layer w0.5: RTD.1@163.195,144.78 167.767,144.78 169.037,143.51 LLC_RTD.P$7@172.085,143.51 ; RTD.1@163.261,144.234 165.495,144.78 RTD.1@163.261,145.326 ; LLC_RTD.P$7@172.029,143.013 169.835,143.51 LLC_RTD.P$7@172.029,144.007
RXD_5V: LLC_Transmitter.P$7 Pressure_transmitter.6 | length 18.5
  Top Layer w0.5: Pressure_transmitter.6@163.195,163.449 165.735,163.449 167.005,164.719 LLC_Transmitter.P$7@172.085,164.719 ; Pressure_transmitter.6@163.261,162.903 165.495,163.449 Pressure_transmitter.6@163.261,163.995 ; LLC_Transmitter.P$7@172.029,164.222 169.835,164.719 LLC_Transmitter.P$7@172.029,165.216
TXD_5V: LLC_Transmitter.P$8 Pressure_transmitter.5 | length 26.6
  Top Layer w0.5: Pressure_transmitter.5@163.171,166.538 165.622,166.37 ; Pressure_transmitter.5@163.341,165.459 165.622,166.37 ; LLC_Transmitter.P$8@174.236,164.405 172.974,166.37 ; LLC_Transmitter.P$8@174.939,165.108 172.974,166.37 ; 165.622,166.37 Pressure_transmitter.5@163.195,165.989 163.576,166.37 172.974,166.37 ; 172.974,166.37 LLC_Transmitter.P$8@174.625,164.719 172.974,166.37
VDD: 
pads on no net: 7407_2.10 7407_2.11 7407_2.12 7407_2.13 7407_3.10 7407_3.11 7407_3.12 7407_3.13 7407_4.10 7407_4.11 7407_4.12 7407_4.13 7810.0 "5V to 3.3V.0" "CAN bus 1.5" "CAN bus 1.8" "CAN bus 2.5" "CAN bus 2.8" "Inductive IC(7407).8" "Inductive IC(7407).9" "Inductive IC(7407).10" "Inductive IC(7407).11" "Inductive IC(7407).12" "Inductive IC(7407).13" "RS232 out 1.1" "RS232 out 1.2" "RS232 out 1.4" "RS232 out 1.6" "RS232 out 1.7" "RS232 out 1.8" "RS232 out 1.10" "RS232 out 2.1" "RS232 out 2.2" "RS232 out 2.4" "RS232 out 2.6" "RS232 out 2.7" "RS232 out 2.8" "RS232 out 2.10" DC_motor1.2 DC_motor2.2 DC_MotorDriver1(7407).4 DC_MotorDriver1(7407).6 DC_MotorDriver1(7407).10 DC_MotorDriver1(7407).12 DSwitch2.7 DSwitch3.7 DSwitch.7 LLC_DCMotor1.P$1 LLC_DCMotor1.P$2 LLC_DCMotor1.P$4 LLC_DCMotor1.P$5 LLC_DCMotor1.P$9 LLC_DCMotor1.P$12 LLC_DCMotor2.P$2 LLC_DCMotor2.P$5 LLC_DCMotor2.P$6 LLC_DCMotor2.P$7 LLC_InductiveSensor.P$6 LLC_InductiveSensor.P$7 LLC_RTD.P$1 LLC_RTD.P$2 LLC_RTD.P$11 LLC_RTD.P$12 MAX232_1.11 MAX232_1.12 MAX232_1.13 MAX232_1.14 MAX232_2.11 MAX232_2.12 MAX232_2.13 MAX232_2.14

## Polygon pours and split planes (outlines as drawn)
GND on Top Layer "Bottom Layer-No Net" (solid, pour order 4): 157.226,256.794 335.407,256.794 335.407,56.642 335.153,56.388 334.899,56.642 157.226,56.642 157.226,256.794
GND on Bottom Layer "Bottom Layer-No Net" (solid, pour order 6): 157.226,256.794 334.899,256.794 335.153,256.54 335.661,256.032 335.661,56.515 157.353,56.515 157.226,56.388 157.48,56.642 157.48,256.54

## Keep-outs
Keep-Out Layer:
  lines w0.254: 157.226,84.328 157.226,256.794 335.407,256.794 335.407,56.388 157.226,56.388 157.226,89.281

## Silkscreen, mask and mechanical layers (free items; w line width, h text height)
Top Overlay:
  text "<-ground->" at 175.006,243.332 h0.8
  text "+24" at 330.835,238.633 h1
  text "+24" at 330.835,233.68 h1
  text "<-ground->" at 282.448,232.791 h0.8
  text "+24" at 330.835,228.854 h1
  text "+24" at 330.962,223.647 h1
  text "GND" at 158.877,209.042 h1
  text "+24" at 331.216,208.407 h1
  text "+24" at 158.75,206.502 h1
  text "+24" at 330.835,203.454 h1
  text "<-ground->" at 282.575,201.422 h0.8
  text "+24" at 331.089,198.374 h1
  text "GND" at 158.75,193.929 h1
  text "+24" at 330.835,193.167 h1
  text "+24" at 158.877,191.516 h1
  text "+24" at 330.962,177.8 h1
  text "GND" at 158.75,175.768 h1
  text "<-ground->" at 176.657,173.609 h0.8 r270
  text "+5" at 158.75,173.101 h1
  text "+24" at 330.581,172.847 h1
  text "<-ground->" at 282.321,171.577 h0.8
  text "+24" at 330.835,167.767 h1
  text "+24" at 330.581,162.56 h1
  text "<-ground->" at 176.53,152.527 h0.8 r270
  text "1" at 317.373,152.527 h1
  text "1" at 304.8,152.4 h1
  text "GND" at 165.227,151.892 h1
  text "GND" at 331.216,151.892 h1
  text "+10" at 331.216,149.733 h1
  text "+5" at 165.227,149.352 h1
  text "1" at 304.927,135.89 h1
  text "1" at 316.992,135.89 h1
  text "GND" at 330.708,134.493 h1
  text "<-ground->" at 238.125,133.604 h0.8 r270
  text "GND" at 160.909,132.588 h1.52
  text "+10" at 330.708,132.334 h1
  text "+" at 223.139,130.175 h1.52
  text "+" at 259.08,125.73 h1.52
  text "<-ground->" at 196.977,124.714 h0.8
  text "<-ground->" at 268.097,124.206 h0.8
  text "+" at 223.266,122.555 h1.52
  text "+" at 252.095,120.269 h1.52
  text "1" at 304.292,118.999 h1
  text "1" at 317.119,118.872 h1
  text "GND" at 331.089,117.856 h1
  text "+" at 223.139,115.824 h1.52
  text "+10" at 331.089,115.697 h1
  text "+" at 259.334,111.252 h1.52
  text "GND" at 161.036,110.363 h1.52
  text "+" at 218.186,108.204 h1.52
  text "<-ground->" at 196.977,107.696 h0.8
  text "+" at 259.588,104.394 h1.52
  text "GND" at 330.835,100.711 h1
  text "+5" at 330.835,98.552 h1
  text "+" at 254.254,97.282 h1.52
  text "+" at 218.313,97.155 h1.52
  text "<-ground->" at 289.56,90.678 h0.8
  text "GND" at 183.896,90.17 h1.52
  text "+" at 257.556,85.217 h1.52
  text "+" at 236.601,81.28 h1.52
  text "GND" at 330.835,81.153 h1
  text "+5" at 330.835,78.994 h1
  text "+" at 204.089,77.47 h1.52
  text "+" at 287.147,77.47 h1.52
  text "GND" at 184.023,72.771 h1.52
  text "+12" at 248.031,60.325 h1
  text "+24" at 238.125,60.198 h1
  text "GND" at 242.951,60.198 h1
  text "GND" at 252.984,60.198 h1
  text "GND" at 232.41,60.071 h1
  text "+5" at 258.191,59.817 h1

## Dimensions
328.93,193.802 to 328.93,180.848 on Mechanical 1
328.93,224.028 to 328.93,211.582 on Mechanical 1
328.93,241.808 to 335.407,256.794 on Mechanical 1
327.406,64.389 to 335.407,56.388 on Mechanical 1
327.406,64.389 to 335.407,56.388 on Mechanical 1
165.227,64.389 to 157.226,56.388 on Mechanical 1
165.227,64.389 to 157.226,56.388 on Mechanical 1
163.322,252.73 to 157.226,256.794 on Mechanical 1
163.322,252.73 to 157.226,256.794 on Mechanical 1
329.311,252.73 to 335.407,256.794 on Mechanical 1
329.311,252.73 to 335.407,256.794 on Mechanical 1
163.195,108.712 to 163.195,120.65 on Mechanical 1
163.195,144.78 to 163.195,130.81 on Mechanical 1
218.58,63.386 to 157.226,56.388 on Mechanical 1
218.58,63.386 to 233.566,67.45 on Mechanical 1
258.966,67.45 to 273.952,63.386 on Mechanical 1
258.966,67.45 to 335.407,56.388 on Mechanical 1
233.566,67.45 to 157.226,56.388 on Mechanical 1
258.966,67.45 to 335.407,56.388 on Mechanical 1
328.93,93.726 to 328.93,81.788 on Mechanical 1
328.93,101.346 to 328.93,113.284 on Mechanical 1
163.195,152.4 to 163.195,163.449 on Mechanical 1
163.195,176.149 to 163.195,189.23 on Mechanical 1
163.195,209.423 to 163.195,228.473 on Mechanical 1
157.226,84.328 to 335.407,56.388 on Mechanical 1
335.407,256.794 to 335.407,56.388 on Mechanical 1
163.195,176.149 to 172.085,174.879 on Mechanical 1
163.195,204.343 to 163.195,194.31 on Mechanical 1
213.487,150.749 to 266.827,150.749 on Mechanical 1
328.93,147.32 to 328.93,135.382 on Mechanical 1
328.93,130.302 to 328.93,118.364 on Mechanical 1
216.027,211.709 to 157.226,256.794 on Mechanical 1

## Text inside footprints (layer, text, board x,y; h text height)
KANAN: Top Overlay "2" at 266.319,214.249 h1.27 r270; Top Overlay "1" at 263.779,214.249 h1.27 r270; Top Overlay "49" at 263.779,148.717 h1.27 r270; Top Overlay "50" at 266.319,148.717 h1.27 r270
KIRI: Top Overlay "2" at 215.519,214.249 h1.27 r270; Top Overlay "1" at 212.979,214.249 h1.27 r270; Top Overlay "49" at 212.979,148.717 h1.27 r270; Top Overlay "50" at 215.519,148.717 h1.27 r270
LCC_comm: Top Overlay "HV" at 232.156,128.524 h1.97 r270; Top Overlay "HV" at 246.126,128.524 h1.97 r270; Top Overlay "LV" at 232.156,133.604 h1.97 r270; Top Overlay "LV" at 246.126,133.604 h1.97 r270; Top Overlay "Chan2" at 235.966,132.334 h1.97 r270; Top Overlay "Chan1" at 242.316,132.334 h1.97 r270
LLC_1: Top Overlay "HV" at 177.419,250.063 h1.97 r180; Top Overlay "HV" at 177.419,236.093 h1.97 r180; Top Overlay "LV" at 182.499,250.063 h1.97 r180; Top Overlay "LV" at 182.499,236.093 h1.97 r180; Top Overlay "Chan2" at 181.229,246.253 h1.97 r180; Top Overlay "Chan1" at 181.229,239.903 h1.97 r180
"LLC_CAN bus": Top Overlay "HV" at 294.767,84.709 h1.97; Top Overlay "HV" at 294.767,98.679 h1.97; Top Overlay "LV" at 289.687,84.709 h1.97; Top Overlay "LV" at 289.687,98.679 h1.97; Top Overlay "Chan2" at 290.957,88.519 h1.97; Top Overlay "Chan1" at 290.957,94.869 h1.97
LLC_DCMotor1: Top Overlay "HV" at 199.39,131.445 h1.97 r180; Top Overlay "HV" at 199.39,117.475 h1.97 r180; Top Overlay "LV" at 204.47,131.445 h1.97 r180; Top Overlay "LV" at 204.47,117.475 h1.97 r180; Top Overlay "Chan2" at 203.2,127.635 h1.97 r180; Top Overlay "Chan1" at 203.2,121.285 h1.97 r180
LLC_DCMotor2: Top Overlay "HV" at 199.39,114.427 h1.97 r180; Top Overlay "HV" at 199.39,100.457 h1.97 r180; Top Overlay "LV" at 204.47,114.427 h1.97 r180; Top Overlay "LV" at 204.47,100.457 h1.97 r180; Top Overlay "Chan2" at 203.2,110.617 h1.97 r180; Top Overlay "Chan1" at 203.2,104.267 h1.97 r180
LLC_InductiveSensor: Top Overlay "HV" at 273.177,118.364 h1.97; Top Overlay "HV" at 273.177,132.334 h1.97; Top Overlay "LV" at 268.097,118.364 h1.97; Top Overlay "LV" at 268.097,132.334 h1.97; Top Overlay "Chan2" at 269.367,122.174 h1.97; Top Overlay "Chan1" at 269.367,128.524 h1.97
LLC_RTD: Top Overlay "HV" at 170.815,147.32 h1.97 r270; Top Overlay "HV" at 184.785,147.32 h1.97 r270; Top Overlay "LV" at 170.815,152.4 h1.97 r270; Top Overlay "LV" at 184.785,152.4 h1.97 r270; Top Overlay "Chan2" at 174.625,151.13 h1.97 r270; Top Overlay "Chan1" at 180.975,151.13 h1.97 r270
LLC_SolenoidValve1: Top Overlay "HV" at 287.655,165.608 h1.97; Top Overlay "HV" at 287.655,179.578 h1.97; Top Overlay "LV" at 282.575,165.608 h1.97; Top Overlay "LV" at 282.575,179.578 h1.97; Top Overlay "Chan2" at 283.845,169.418 h1.97; Top Overlay "Chan1" at 283.845,175.768 h1.97
LLC_SolenoidValve2: Top Overlay "HV" at 287.528,226.949 h1.97; Top Overlay "HV" at 287.528,240.919 h1.97; Top Overlay "LV" at 282.448,226.949 h1.97; Top Overlay "LV" at 282.448,240.919 h1.97; Top Overlay "Chan2" at 283.718,230.759 h1.97; Top Overlay "Chan1" at 283.718,237.109 h1.97
LLC_SolenoidValve3: Top Overlay "HV" at 287.528,195.453 h1.97; Top Overlay "HV" at 287.528,209.423 h1.97; Top Overlay "LV" at 282.448,195.453 h1.97; Top Overlay "LV" at 282.448,209.423 h1.97; Top Overlay "Chan2" at 283.718,199.263 h1.97; Top Overlay "Chan1" at 283.718,205.613 h1.97
LLC_Transmitter: Top Overlay "HV" at 170.815,168.529 h1.97 r270; Top Overlay "HV" at 184.785,168.529 h1.97 r270; Top Overlay "LV" at 170.815,173.609 h1.97 r270; Top Overlay "LV" at 184.785,173.609 h1.97 r270; Top Overlay "Chan2" at 174.625,172.339 h1.97 r270; Top Overlay "Chan1" at 180.975,172.339 h1.97 r270
"RS232 out 1": Top Overlay "10" at 179.959,75.057 h1.27 r90; Top Overlay "9" at 182.499,75.057 h1.27 r90; Top Overlay "1" at 182.499,61.341 h1.27 r90; Top Overlay "2" at 179.959,60.833 h1.27 r90
"RS232 out 2": Top Overlay "10" at 179.959,92.329 h1.27 r90; Top Overlay "9" at 182.499,92.329 h1.27 r90; Top Overlay "1" at 182.499,78.613 h1.27 r90; Top Overlay "2" at 179.959,78.105 h1.27 r90